# EAGLE board tcore (EAGLE 7.4.0)
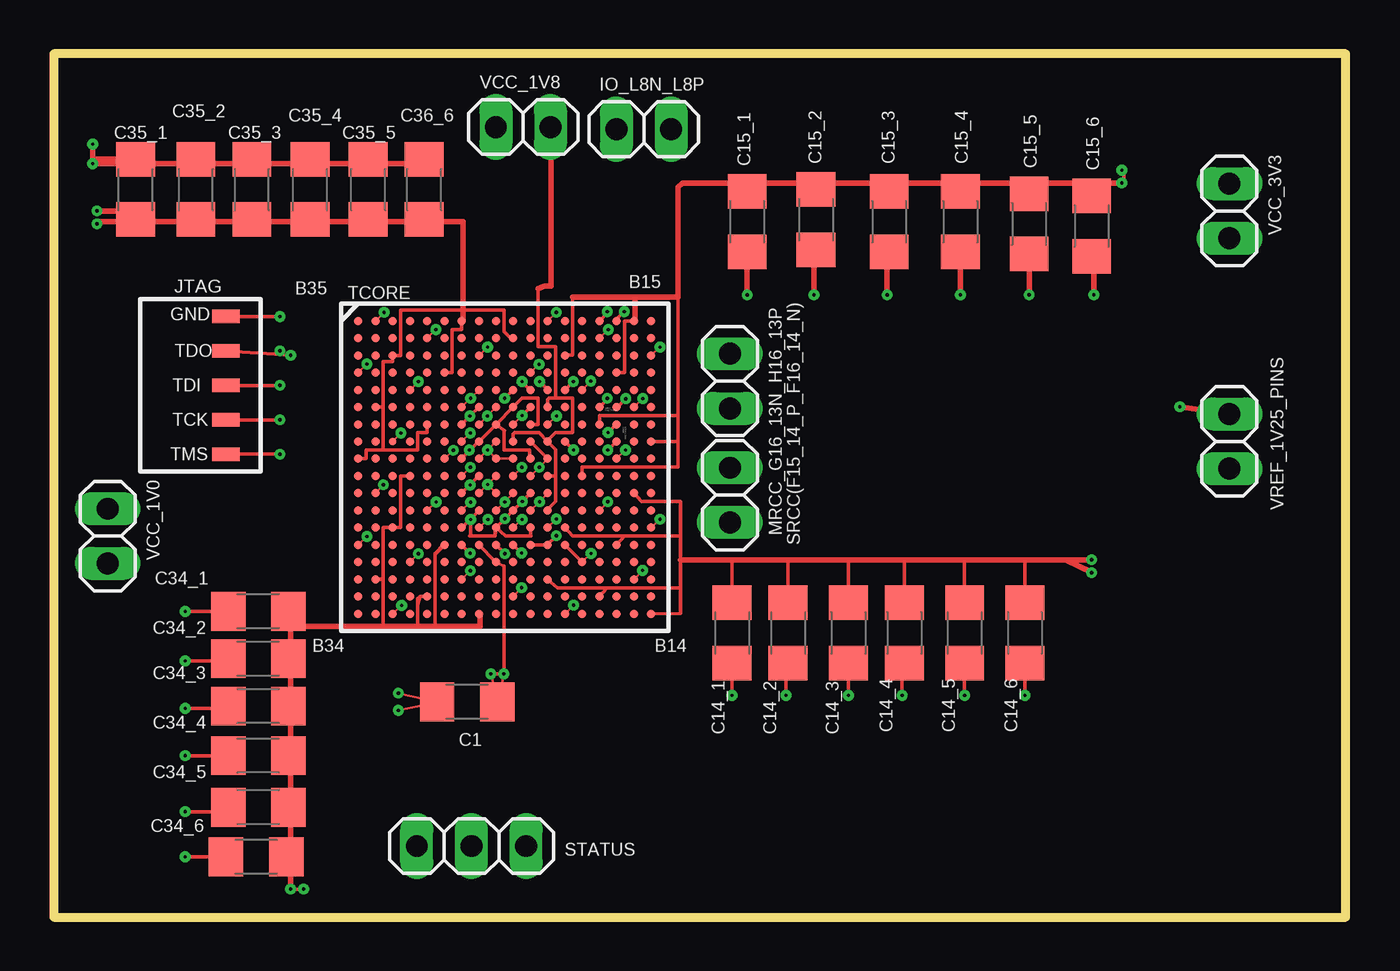
[diagram p0: board, top side]
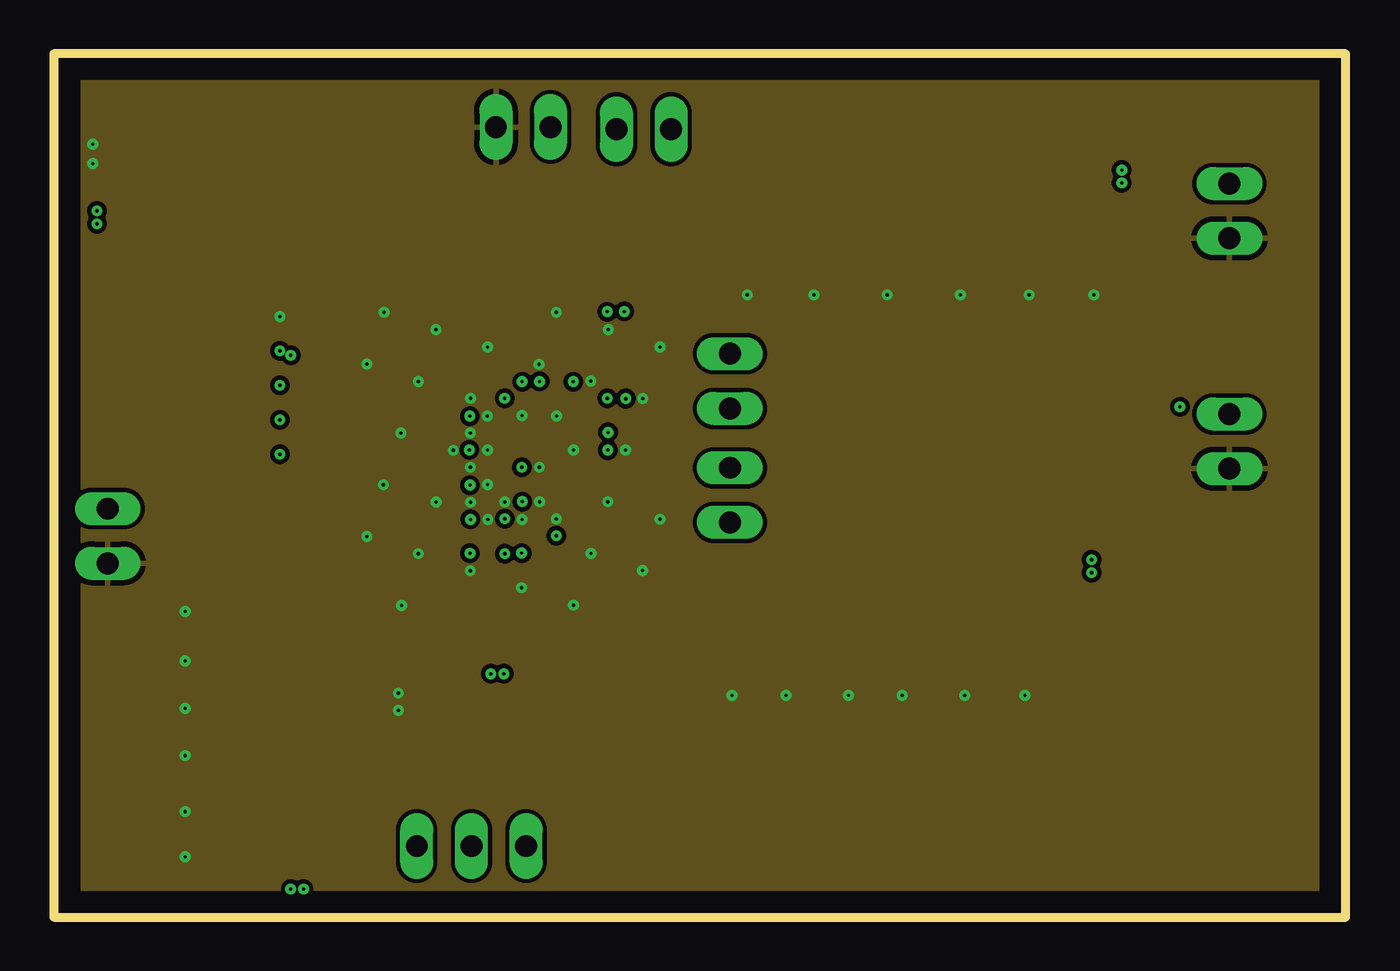
[diagram p1: board, inner layer Route2]
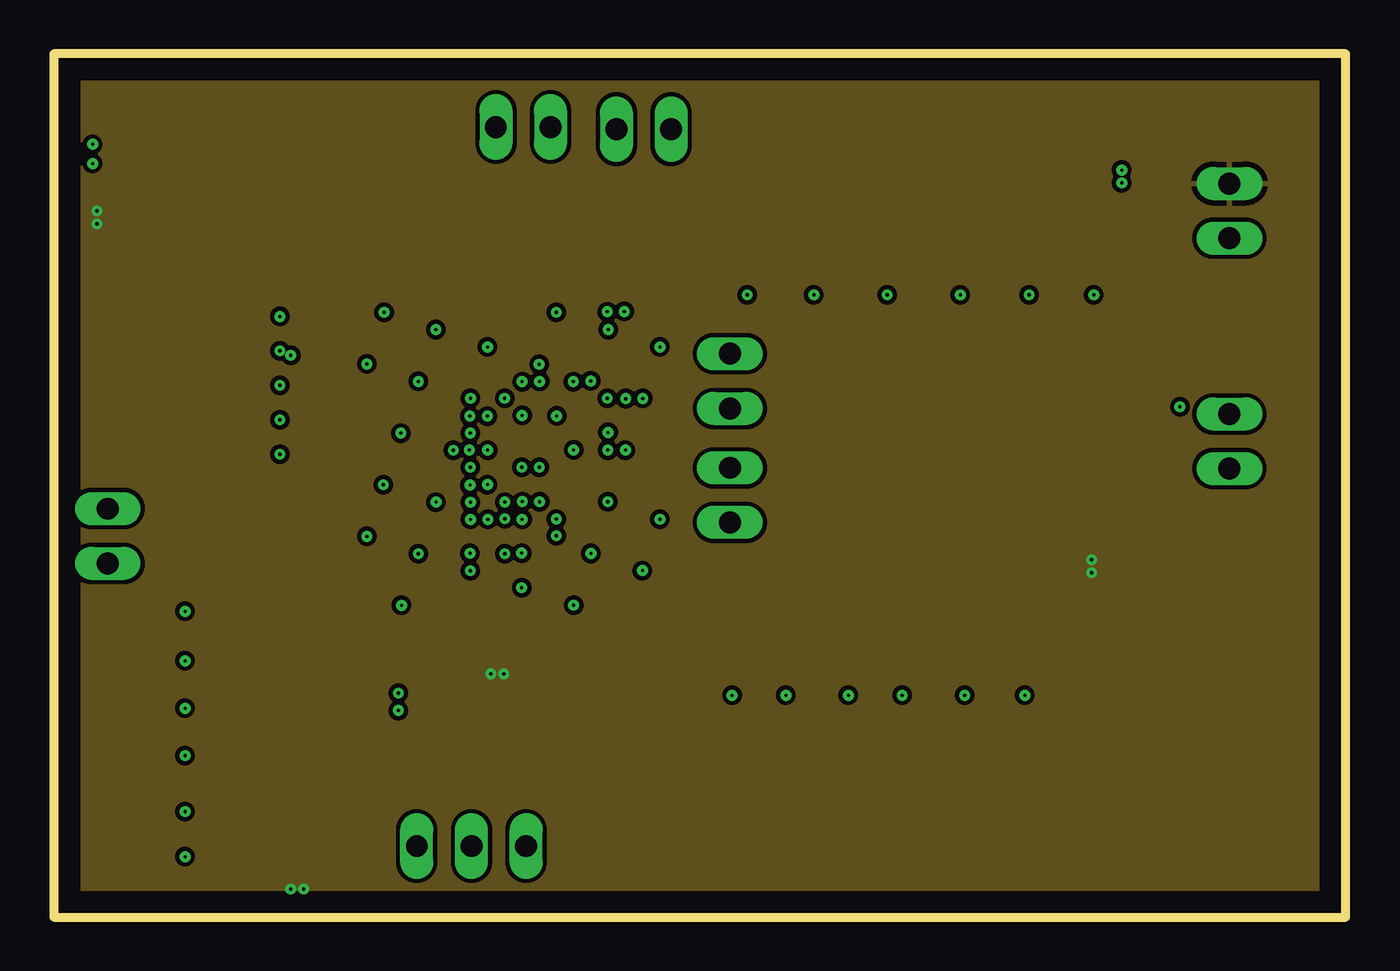
[diagram p2: board, inner layer Route15]
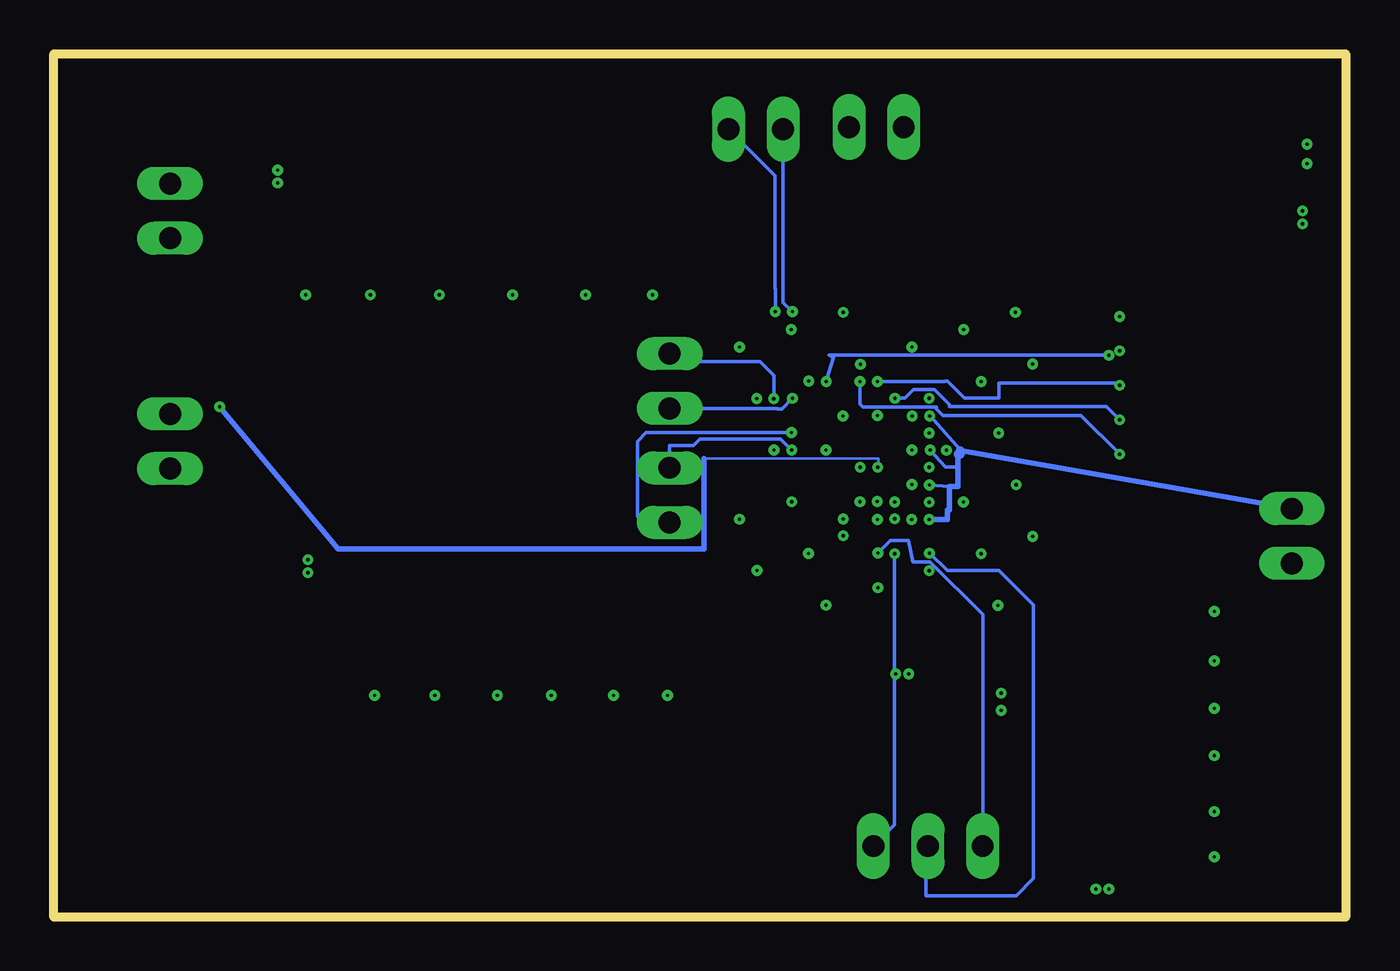
[diagram p3: board, bottom side, seen from below]

Size 60 x 40.1 mm. Coordinates in mm from the lower left corner, seen from the top.
Outline: 0,0 60,0 60,40.1 0,40.1 0,0
Copper layers (1+2*15+16): Top 0.035mm / dielectric 14mil / Route2 0.035mm / dielectric 28mil / Route15 0.035mm / dielectric 14mil / Bottom 0.035mm
Design rules "default *": minimum track width 10mil, minimum drill 0.15mm, track to track 8mil, track to pad 8mil, pad to pad 8mil, via to via 8mil, smd to smd 8mil, copper to edge 40mil, drill to drill 8mil, minimum pad ring 10mil, minimum via ring 0.175mm, stop-mask expansion 4mil, vias tented up to drill 0mil, thermal gap 10mil
Net classes: 0 default: width 1.25 mm; 1 GND: width 1.25 mm; 2 VCC_1V0: width 1.25 mm; 3 VREF_1V25: width 1.25 mm; 4 VCC_1V8: width 1.25 mm; 5 VCC_3V3: width 1.25 mm

## Footprints (pad centres in the part's own frame; a part is rotated, then mirrored left to right if it is on the bottom)
C1206 = smd 1.6 x 1.8: 1 -1.4,0; 2 1.4,0
1X02 = drill 1.016 long: 1 -1.27,0; 2 1.27,0
JTAG_HDR = smd 1.27 x 0.635: GND 4.8,8; TCK 4.8,3.2; TDI 4.8,4.8; TDO 4.8,6.4; TMS 4.8,1.6
1X03 = drill 1.016 long: 1 -2.54,0; 2 0,0; 3 2.54,0
TCORE_PAC = smd 0.4 x 0.4: A01@IO_L9N_T1_B35 0.8,14.4; A02@GND 1.6,14.4; A03@IO_L8N_T1_B35 2.4,14.4; A04@IO_L8P_T1_B35 3.2,14.4; A05@IO_L3N_T0_B35 4,14.4; A06@IO_L3P_T0_B35 4.8,14.4; A07@VCCO_B35 5.6,14.4; A08@IO_L12N_T1_B16 6.4,14.4; A09@IO_L14N_T2_B16 7.2,14.4; A10@IO_L14P_T2_B16 8,14.4; A11@IO_L4N_T0_B15 8.8,14.4; A12@GND 9.6,14.4; A13@IO_L9P_T1_B15 10.4,14.4; A14@IO_L9N_T1_B15 11.2,14.4; A15@IO_L8P_T1_B15 12,14.4; A16@IO_L8N_T1_B15 12.8,14.4; A17@VCCO_B15 13.6,14.4; A18@IO_L10N_T1_B15 14.4,14.4; B01@IO_L9P_T1_B35 0.8,13.6; B02@IO_L10N_T1_B35 1.6,13.6; B03@IO_L10P_T1_B35 2.4,13.6; B04@IO_L7N_T1_B35 3.2,13.6; B05@GND 4,13.6; B06@IO_L2N_T0_B35 4.8,13.6; B07@IO_L2P_T0_B35 5.6,13.6; B08@IO_L12P_T1_B16 6.4,13.6; B09@IO_L11N_T1_B16 7.2,13.6; B10@VCCO_B16 8,13.6; B11@IO_L4P_T0_B15 8.8,13.6; B12@IO_L3N_T0_B15 9.6,13.6; B13@IO_L2P_T0_B15 10.4,13.6; B14@IO_L2N_T0_B15 11.2,13.6; B15@GND 12,13.6; B16@IO_L7P_T1_B15 12.8,13.6; B17@IO_L7N_T1_B15 13.6,13.6; B18@IO_L10P_T1_B15 14.4,13.6; C01@IO_L16N_T2_B35 0.8,12.8; C02@IO_L16P_T2_B35 1.6,12.8; C03@VCCO_B35 2.4,12.8; C04@IO_L7P_T1_B35 3.2,12.8; C05@IO_L1N_T0_B35 4,12.8; C06@IO_L1P_T0_B35 4.8,12.8; C07@IO_L4N_T0_B35 5.6,12.8; C08@GND 6.4,12.8; C09@IO_L11P_T1_B16 7.2,12.8; C10@IO_L13N_T2_B16 8,12.8; C11@IO_L13P_T2_B16 8.8,12.8; C12@IO_L3P_T0_B15 9.6,12.8; C13@VCCO_B15 10.4,12.8; C14@IO_L1N_T0_B15 11.2,12.8; C15@IO_L12N_T1_B15 12,12.8; C16@IO_L20P_T3B15 12.8,12.8; C17@IO_L20N_T3_B15 13.6,12.8; C18@GND 14.4,12.8; D01@GND 0.8,12; D02@IO_L14N_T2_B35 1.6,12; D03@IO_L12N_T1_B35 2.4,12; D04@IO_L11N_T1_B35 3.2,12; D05@IO_L11P_T1_B35 4,12; D06@VCCO_B35 4.8,12; D07@IO_L6N_T0_VREF_B35 5.6,12; D08@IO_L4P_T0_B35 6.4,12; D09@IO_L6N_T0_VREF_B16 7.2,12; D10@IO_L19N_T3_VREF_B16 8,12; D11@GND 8.8,12; D12@IO_L6P_T0_B15 9.6,12; D13@IO_L6N_T0_VREF_B15 10.4,12; D14@IO_L1P_T0_B15 11.2,12; D15@IO_L12P_T1_B15 12,12; D16@VCCO_B15 12.8,12; D17@IO_L16N_T2_B15 13.6,12; D18@IO_L21N_T3_B15 14.4,12; E01@IO_L18N_T2_B35 0.8,11.2; E02@IO_L14P_T2_B35 1.6,11.2; E03@IO_L12P_T1_B35 2.4,11.2; E04@GND 3.2,11.2; E05@IO_L5N_T0_B35 4,11.2; E06@IO_L5P_T0_B35 4.8,11.2; E07@IO_L6P_T0_B35 5.6,11.2; E08@VCCBATT_B0 6.4,11.2; E09@CCLK_B0 7.2,11.2; E10@TCK_B0 8,11.2; E11@TDI_B0 8.8,11.2; E12@TMS_B0 9.6,11.2; E13@TDO_B0 10.4,11.2; E14@GND 11.2,11.2; E15@IO_L11P_T1_B15 12,11.2; E16@IO_L11N_T1_B15 12.8,11.2; E17@IO_L16P_T2_B15 13.6,11.2; E18@IO_L21P_T3_B15 14.4,11.2; F01@IO_L18P_T2_B35 0.8,10.4; F02@VCCO_B35 1.6,10.4; F03@IO_L13N_T2_B35 2.4,10.4; F04@IO_L13P_T2_B35 3.2,10.4; F05@IO_0_B35 4,10.4; F06@IO_L19N_T3_VREF_B35 4.8,10.4; F07@GND 5.6,10.4; F08@VCCINT 6.4,10.4; F09@GND 7.2,10.4; F10@VCCBRAM 8,10.4; F11@GND 8.8,10.4; F12@VCCAUX 9.6,10.4; F13@IO_L5P_T0_B15 10.4,10.4; F14@IO_L5N_T0_B15 11.2,10.4; F15@IO_L14P_T2_B15 12,10.4; F16@IO_L14N_T2_B15 12.8,10.4; F17@GND 13.6,10.4; F18@IO_L22N_T3_B15 14.4,10.4; G01@IO_L17N_T2_B35 0.8,9.6; G02@IO_L15N_T2_B5 1.6,9.6; G03@IO_L20N_T3_B35 2.4,9.6; G04@IO_L20P_T3_B35 3.2,9.6; G05@VCCO_B35 4,9.6; G06@IO_L19P_T3_B35 4.8,9.6; G07@VCCINT 5.6,9.6; G08@GND 6.4,9.6; G09@VCCINT 7.2,9.6; G10@GND 8,9.6; G11@VCCBRAM 8.8,9.6; G12@GND 9.6,9.6; G13@IO_0_B15 10.4,9.6; G14@IO_L15N_T2_B15 11.2,9.6; G15@VCCO_15 12,9.6; G16@IO_L13N_T2_B15 12.8,9.6; G17@IO_L18N_T2_B15 13.6,9.6; G18@IO_L22P_T3_B15 14.4,9.6; H01@IO_L17P_T2_B35 0.8,8.8; H02@IO_L15P_T2_B35 1.6,8.8; H04@IO_L21N_T3_B35 3.2,8.8; H05@IO_L24N_T3_B35 4,8.8; H06@IO_L24P_T3_B35 4.8,8.8; H07@GND 5.6,8.8; H08@VCCINT 6.4,8.8; H09@GNDADC_B0 7.2,8.8; H10@VCCADC_B0 8,8.8; H11@GND 8.8,8.8; H12@VCCAUX 9.6,8.8; H13@GND 10.4,8.8; H14@IO_L15P_T2_B15 11.2,8.8; H15@IO_L19N_T3_VREF_B15 12,8.8; H16@IO_L13P_T2_B15 12.8,8.8; H17@IO_L18P_T2_B15 13.6,8.8; H18@VCCO_B15 14.4,8.8; J01@VCCO_B35 0.8,8; J02@IO_L22N_T3_B35 1.6,8; J03@IO_L22P_T3_B35 2.4,8; J04@IO_L21P_T3_B35 3.2,8; J05@IO_25_B35 4,8; J06@GND 4.8,8; J07@VCCINT 5.6,8; J08@GND 6.4,8; J09@VREFN_0 7.2,8; J10@VP_0 8,8; J11@VCCINT 8.8,8; J12@GND 9.6,8; J13@IO_L17N_T2_B15 10.4,8; J14@IO_L19P_T3_B15 11.2,8; J15@IO_L24N_T3_B15 12,8; J16@GND 12.8,8; J17@IO_L23P_T3_B15 13.6,8; J18@IO_L23N_T3_B15 14.4,8; K01@IO_L23N_T3_B35 0.8,7.2; K02@IO_L23P_T3_B35 1.6,7.2; K03@IO_L2P_T0_B34 2.4,7.2; K04@VCCO_B34 3.2,7.2; K05@IO_L5P_T0_B34 4,7.2; K06@IO_0_B34 4.8,7.2; K07@GND 5.6,7.2; K08@VCCINT 6.4,7.2; K09@VN_B0 7.2,7.2; K10@VREFP_B0 8,7.2; K11@GND 8.8,7.2; K12@VCCAUX 9.6,7.2; K13@IO_L17P_T2_B15 10.4,7.2; K14@VCCO_B15 11.2,7.2; K15@IO_L24P_T3_B15 12,7.2; K16@IO_25_B15 12.8,7.2; K17@IO_L1P_T0_B14 13.6,7.2; K18@IO_L1N_T0_B14 14.4,7.2; L01@IO_L1P_T0_34 0.8,6.4; L02@GND 1.6,6.4; L03@IO_L2N_T0_B34 2.4,6.4; L04@IO_L5N_T0_B34 3.2,6.4; L05@IO_L6N_T0_VREF_B34 4,6.4; L06@IO_L6P_T0_B34 4.8,6.4; L07@VCCINT 5.6,6.4; L08@GND 6.4,6.4; L09@DXN_B0 7.2,6.4; L10@DXP_B0 8,6.4; L11@VCCINT 8.8,6.4; L12@GND 9.6,6.4; L13@IO_L6P_T0_B14 10.4,6.4; L14@IO_L2P_T0_B14 11.2,6.4; L15@IO_L3P_T0_B14 12,6.4; L16@IO_L3N_T0_B14 12.8,6.4; L17@VCCO_B14 13.6,6.4; L18@IO_L4P_T0_B14 14.4,6.4; M01@IO_L1N_T0_B34 0.8,5.6; M02@IO_L4N_T0_B34 1.6,5.6; M03@IO_L4P_T0_B34 2.4,5.6; M04@IO_L16P_T2_B34 3.2,5.6; M05@GND 4,5.6; M06@IO_L18P_T2_B34 4.8,5.6; M07@GND 5.6,5.6; M08@VCCINT 6.4,5.6; M09@GND 7.2,5.6; M10@VCCINT 8,5.6; M11@GND 8.8,5.6; M12@VCCAUX 9.6,5.6; M13@IO_L6N_T0_VREF_B14 10.4,5.6; M14@IO_L2N_T0_B14 11.2,5.6; M15@GND 12,5.6; M16@IO_L10P_T1_B14 12.8,5.6; M17@IO_L10N_T1_B14 13.6,5.6; M18@IO_L4N_T0_B14 14.4,5.6; N01@IO_L3N_T0_B34 0.8,4.8; N02@IO_L3P_T0_B34 1.6,4.8; N03@VCCO_B34 2.4,4.8; N04@IO_L16N_T2_B34 3.2,4.8; N05@IO_L13P_T2_B34 4,4.8; N06@IO_L18N_T2_B34 4.8,4.8; N07@VCCINT 5.6,4.8; N08@GND 6.4,4.8; N09@VCCINT 7.2,4.8; N10@GND 8,4.8; N11@VCCINT 8.8,4.8; N12@GND 9.6,4.8; N13@VCCO_14 10.4,4.8; N14@IO_L8P_T1_B14 11.2,4.8; N15@IO_L11P_T1_B14 12,4.8; N16@IO_L11N_T1_B14 12.8,4.8; N17@IO_L9P_T1_B14 13.6,4.8; N18@GND 14.4,4.8; P01@GND 0.8,4; P02@IO_L15P_T2_B34 1.6,4; P03@IO_L14N_T2_B34 2.4,4; P04@IO_L14P_T2_B34 3.2,4; P05@IO_L13N_T2_B34 4,4; P06@VCCO_B34 4.8,4; P07@INIT_B_B0 5.6,4; P08@CFGBVS_0B 6.4,4; P09@PROGRAM_B_B0 7.2,4; P10@DONE_B0 8,4; P11@M2_B0 8.8,4; P12@M0_B0 9.6,4; P13@M1_B0 10.4,4; P14@IO_L8N_T1_B14 11.2,4; P15@IO_L13P_T2_B14 12,4; P16@VCCO_14 12.8,4; P17@IO_L12P_T1_B14 13.6,4; P18@IO_L9N_T1_B14 14.4,4; R01@IO_L17P_T2_B34 0.8,3.2; R02@IO_L15N_T2_B34 1.6,3.2; R03@IO_L11P_T1_B34 2.4,3.2; R04@GND 3.2,3.2; R05@IO_L19N_T3_VREF_B34 4,3.2; R06@IO_L19P_T3_B34 4.8,3.2; R07@IO_L23P_T3_B34 5.6,3.2; R08@IO_L24P_T3_B34 6.4,3.2; R09@VCCO_B0 7.2,3.2; R10@IO_25_B14 8,3.2; R11@IO_0_B14 8.8,3.2; R12@IO_L5P_T0_B14 9.6,3.2; R13@IO_L5N_T0_B14 10.4,3.2; R14@GND 11.2,3.2; R15@IO_L13N_T2_B14 12,3.2; R16@IO_L15P_T2_B_14 12.8,3.2; R17@IO_L12N_T1_B14 13.6,3.2; R18@IO_L7P_T1_B14 14.4,3.2; T01@IO_L17N_T2_B34 0.8,2.4; T02@VCCO_B34 1.6,2.4; T03@IO_L11N_T1_B34 2.4,2.4; T04@IO_L12N_T1_B34 3.2,2.4; T05@IO_L12P_T1_B34 4,2.4; T06@IO_L23N_T3_B34 4.8,2.4; T07@GND 5.6,2.4; T08@IO_L24N_T3_B34 6.4,2.4; T09@IO_L24P_T3_B14 7.2,2.4; T10@IO_L24N_T3_B14 8,2.4; T11@IO_L19P_T3_B14 8.8,2.4; T12@VCCO_B14 9.6,2.4; T13@IO_L23P_T3_B14 10.4,2.4; T14@IO_L14P_T2_B14 11.2,2.4; T15@IO_L14N_T2_B14 12,2.4; T16@IO_L15N_T2_B14 12.8,2.4; T17@GND 13.6,2.4; T18@IO_L7N_T1_B14 14.4,2.4; U01@IO_L7P_T1_B34 0.8,1.6; U02@IO_L9P_T1_B34 1.6,1.6; U03@IO_L8N_T1_B34 2.4,1.6; U04@IO_L8P_T1_B34 3.2,1.6; U05@VCCO_B34 4,1.6; U06@IO_L22N_T3_B34 4.8,1.6; U07@IO_L22P_T3_B34 5.6,1.6; U08@IO_25_B34 6.4,1.6; U09@IO_L21P_T3_B34 7.2,1.6; U10@GND 8,1.6; U11@IO_L19N_T3_VREF_B14 8.8,1.6; U12@IO_L20P_T3_B14 9.6,1.6; U13@IO_L23N_T3_B14 10.4,1.6; U14@IO_L22P_T3_B14 11.2,1.6; U15@VCCO_B14 12,1.6; U16@IO_L18P_T2_B14 12.8,1.6; U17@IO_L17P_T2_B14 13.6,1.6; U18@IO_L17N_T2_B14 14.4,1.6; V01@IO_L7N_T1_B34 0.8,0.8; V02@IO_L9N_T1_B34 1.6,0.8; V03@GND 2.4,0.8; V04@IO_L10N_T1_B34 3.2,0.8; V05@IO_L10P_T1_B34 4,0.8; V06@IO_L20N_T3_B34 4.8,0.8; V07@IO_L20P_T3_B34 5.6,0.8; V08@VCCO_B34 6.4,0.8; V09@IO_L21N_T3_B34 7.2,0.8; V10@IO_L21P_T3_B14 8,0.8; V11@IO_L21N_T3_B14 8.8,0.8; V12@IO_L20N_T3_B14 9.6,0.8; V13@GND 10.4,0.8; V14@IO_L22N_T3_B14 11.2,0.8; V15@IO_L16P_T2_B14 12,0.8; V16@IO_L16N_T2_B14 12.8,0.8; V17@IO_L18N_T2_B14 13.6,0.8; V18@VCCO_B14 14.4,0.8 | smd 0.36 x 0.36: H03@GND 2.4,8.8

## Placement (x,y rotation side)
C1  47uF  [C1206]  19.2,10 180 top
C14_1  0.47uF  [C1206]  31.5,13.2 270 top
C14_2  0.47uF  [C1206]  34.1,13.2 270 top
C14_3  4.7uF  [C1206]  36.9,13.2 270 top
C14_4  4.7uF  [C1206]  39.5,13.2 270 top
C14_5  4.7uF  [C1206]  42.3,13.2 270 top
C14_6  4.7uF  [C1206]  45.1,13.2 270 top
C15_1  0.47uF  [C1206]  32.2,32.3 270 top
C15_2  0.47uF  [C1206]  35.4,32.4 270 top
C15_3  4.7uF  [C1206]  38.8,32.3 270 top
C15_4  4.7uF  [C1206]  42.1,32.3 270 top
C15_5  4.7uF  [C1206]  45.3,32.2 270 top
C15_6  4.7uF  [C1206]  48.2,32.1 270 top
C34_1  0.47uF  [C1206]  9.5,14.2 180 top
C34_2  0.47uF  [C1206]  9.5,12 180 top
C34_3  4.7uF  [C1206]  9.5,9.8 180 top
C34_4  4.7uF  [C1206]  9.5,7.5 180 top
C34_5  4.7uF  [C1206]  9.5,5.1 180 top
C34_6  4.7uF  [C1206]  9.4,2.8 180 top
C35_1  0.47uF  [C1206]  3.8,33.8 90 top
C35_2  0.47uF  [C1206]  6.6,33.8 90 top
C35_3  4.7uF  [C1206]  9.2,33.8 90 top
C35_4  4.7uF  [C1206]  11.9,33.8 90 top
C35_5  4.7uF  [C1206]  14.6,33.8 90 top
C36_6  4.7uF  [C1206]  17.2,33.8 90 top
IO_L8N_L8P  [1X02]  27.4,36.6 180 top
JTAG_HEADER1  JTAG_HEADER  [JTAG_HDR]  3.2,19.9 0 top
MRCC_G16_13N_H16_13P  [1X02]  31.4,24.9 270 top
SRCC(F15_14_P_F16_14_N)  [1X02]  31.4,19.6 90 top
STATUS  3:P 2:I 1:D  [1X03]  19.4,3.3 0 top
TCORE  TCORECFG324  [TCORE_PAC]  13.34,13.29 0 top
VCC_1V0  [1X02]  2.5,17.7 270 top
VCC_1V8  [1X02]  21.8,36.7 180 top
VCC_3V3  [1X02]  54.6,32.8 270 top
VREF_1V25_PINS  [1X02]  54.6,22.1 270 top

## Library data of the parts
C1 C14_1-C14_6 C15_1-C15_6 C34_1-C34_6 C35_1-C35_5 C36_6 = rcl
IO_L8N_L8P MRCC_G16_13N_H16_13P SRCC(F15_14_P_F16_14_N) STATUS VCC_1V0 VCC_1V8 VCC_3V3 VREF_1V25_PINS = pinhead
JTAG_HEADER1 TCORE = tcore

## Nets
GND: C1.2 C14_1.2 C15_1.2 C34_1.2 C35_1.2 JTAG_HEADER1.GND TCORE.A02@GND TCORE.A12@GND TCORE.B05@GND TCORE.B15@GND TCORE.C08@GND TCORE.C18@GND TCORE.D01@GND TCORE.D11@GND TCORE.E04@GND TCORE.E08@VCCBATT_B0 TCORE.E14@GND TCORE.F07@GND TCORE.F09@GND TCORE.F11@GND TCORE.F17@GND TCORE.G08@GND TCORE.G10@GND TCORE.G12@GND TCORE.H03@GND TCORE.H07@GND TCORE.H09@GNDADC_B0 TCORE.H11@GND TCORE.H13@GND TCORE.J06@GND TCORE.J08@GND TCORE.J09@VREFN_0 TCORE.J10@VP_0 TCORE.J12@GND TCORE.J16@GND TCORE.K07@GND TCORE.K09@VN_B0 TCORE.K11@GND TCORE.L02@GND TCORE.L08@GND TCORE.L09@DXN_B0 TCORE.L10@DXP_B0 TCORE.L12@GND TCORE.M05@GND TCORE.M07@GND TCORE.M09@GND TCORE.M11@GND TCORE.M15@GND TCORE.N08@GND TCORE.N10@GND TCORE.N12@GND TCORE.N18@GND TCORE.P01@GND TCORE.P13@M1_B0 TCORE.R04@GND TCORE.R14@GND TCORE.T07@GND TCORE.T17@GND TCORE.U10@GND TCORE.V03@GND TCORE.V13@GND VCC_1V0.2 VCC_1V8.2 VCC_3V3.2 VREF_1V25_PINS.2
N$3: JTAG_HEADER1.TDO TCORE.E13@TDO_B0
N$4: JTAG_HEADER1.TCK TCORE.E10@TCK_B0
N$5: JTAG_HEADER1.TDI TCORE.E11@TDI_B0
N$6: JTAG_HEADER1.TMS TCORE.E12@TMS_B0
N$11: STATUS.3 TCORE.P09@PROGRAM_B_B0
N$15: STATUS.2 TCORE.P07@INIT_B_B0
N$16: STATUS.1 TCORE.P10@DONE_B0
N$20: IO_L8N_L8P.2 TCORE.A15@IO_L8P_T1_B15
N$23: MRCC_G16_13N_H16_13P.1 TCORE.F16@IO_L14N_T2_B15
N$24: MRCC_G16_13N_H16_13P.2 TCORE.F15@IO_L14P_T2_B15
N$25: SRCC(F15_14_P_F16_14_N).1 TCORE.G16@IO_L13N_T2_B15
N$26: SRCC(F15_14_P_F16_14_N).2 TCORE.H16@IO_L13P_T2_B15
N$28: IO_L8N_L8P.1 TCORE.A16@IO_L8N_T1_B15
VCC_1V0 [VCC_1V0]: TCORE.F08@VCCINT TCORE.F10@VCCBRAM TCORE.G07@VCCINT TCORE.G09@VCCINT TCORE.G11@VCCBRAM TCORE.H08@VCCINT TCORE.J07@VCCINT TCORE.J11@VCCINT TCORE.K08@VCCINT TCORE.L07@VCCINT TCORE.L11@VCCINT TCORE.M08@VCCINT TCORE.M10@VCCINT TCORE.N07@VCCINT TCORE.N09@VCCINT TCORE.N11@VCCINT VCC_1V0.1
VCC_1V8: TCORE.F12@VCCAUX TCORE.H10@VCCADC_B0 TCORE.H12@VCCAUX TCORE.K12@VCCAUX TCORE.M12@VCCAUX VCC_1V8.1
VCC_3V3: TCORE.P11@M2_B0 TCORE.P12@M0_B0
VCCO_B14 [VCC_3V3]: C1.1 TCORE.A07@VCCO_B35 TCORE.B10@VCCO_B16 TCORE.C03@VCCO_B35 TCORE.D06@VCCO_B35 TCORE.F02@VCCO_B35 TCORE.G05@VCCO_B35 TCORE.J01@VCCO_B35 TCORE.K04@VCCO_B34 TCORE.L17@VCCO_B14 TCORE.N03@VCCO_B34 TCORE.N13@VCCO_14 TCORE.P06@VCCO_B34 TCORE.P08@CFGBVS_0B TCORE.P16@VCCO_14 TCORE.R09@VCCO_B0 TCORE.T02@VCCO_B34 TCORE.T12@VCCO_B14 TCORE.U05@VCCO_B34 TCORE.U15@VCCO_B14 TCORE.V08@VCCO_B34 TCORE.V18@VCCO_B14 VCC_3V3.1
VCCO_B15: TCORE.A17@VCCO_B15 TCORE.C13@VCCO_B15 TCORE.D16@VCCO_B15 TCORE.G15@VCCO_15 TCORE.H18@VCCO_B15 TCORE.K14@VCCO_B15
VREF_1V25 [VREF_1V25]: TCORE.K10@VREFP_B0 VREF_1V25_PINS.1

## Tracks (layer width: path | path; a pad name or v marks a point on that pad's centre or on a via)
GND  (via drill 0.15)
  Top 0.125: TCORE.F07@GND v19.35,24.1 TCORE.E08@VCCBATT_B0 | TCORE.G08@GND v20.13,23.27 TCORE.F09@GND | TCORE.G10@GND v21.75,23.3 | TCORE.J06@GND v18.55,21.68 | TCORE.H07@GND v19.34,22.48 | TCORE.J08@GND v20.15,21.69 | TCORE.K07@GND v19.34,20.89 | TCORE.M05@GND v17.75,19.28 | TCORE.L02@GND v15.31,20.08 | TCORE.H03@GND v16.12,22.48 | TCORE.T07@GND v19.34,16.09 | TCORE.R04@GND v16.93,16.88 | TCORE.V03@GND v16.15,14.48 | TCORE.P01@GND v14.54,17.68 | TCORE.N08@GND v20.16,18.47 | TCORE.M07@GND v19.35,19.27 | TCORE.N10@GND v21.75,18.47 | TCORE.M09@GND v20.95,19.28 TCORE.L10@DXP_B0 | TCORE.K11@GND v22.55,20.89 TCORE.J12@GND | TCORE.N18@GND v28.15,18.48 | TCORE.T17@GND v27.34,16.1 | TCORE.M15@GND v25.73,19.29 | TCORE.J16@GND v26.55,21.69 | TCORE.F17@GND v27.35,24.09 | TCORE.E14@GND v24.94,24.9 | TCORE.C18@GND v28.15,26.48 | TCORE.B15@GND v25.75,27.29 | TCORE.A12@GND v23.34,28.09 | TCORE.D11@GND v22.54,25.68 | TCORE.C08@GND v20.14,26.48 | TCORE.D01@GND v14.54,25.69 | TCORE.A02@GND v15.34,28.09 | TCORE.B05@GND v17.74,27.29 | TCORE.M11@GND v22.56,19.29 TCORE.L12@GND | TCORE.N12@GND v23.34,18.49 | TCORE.R14@GND v24.95,16.89 | TCORE.U10@GND v21.73,15.3 | TCORE.V13@GND v24.14,14.49 | TCORE.L08@GND v20.14,20.09 | TCORE.E04@GND v16.93,24.88 | TCORE.G12@GND v23.35,23.28 | TCORE.H09@GNDADC_B0 v20.15,21.69 | TCORE.J10@VP_0 TCORE.J09@VREFN_0 v20.15,21.69 | v20.15,21.69 20.2,21.7 | TCORE.L09@DXN_B0 v20.14,20.09 | TCORE.K09@VN_B0 v20.14,20.09 | v16,10.4 C1.2 | v16,9.6 17.9,10
  Top 0.152: v31.5,10.3 C14_1.2 | v34,10.3 34,11.4 | v36.9,10.3 36.9,11.5 | v39.4,10.3 39.4,11.3 | v42.3,10.3 42.3,11.3 | v6.1,14.2 C34_1.2 8.2,14.2 | v6.1,11.9 8.1,11.9 | v6.1,9.7 8.1,9.7 | v6.1,7.5 7.9,7.5 | v6.1,4.9 8.1,4.9 | v6.1,2.8 7.8,2.8 | TCORE.F11@GND v21.75,23.3 | TCORE.H11@GND TCORE.J12@GND | TCORE.H13@GND v24.14,21.7 | TCORE.P13@M1_B0 TCORE.R14@GND | v10.5,27.9 JTAG_HEADER1.GND
  Top 0.254: C15_1.2 v32.2,28.9 | v35.3,28.9 35.3,30.5 | v38.7,28.9 38.7,30.3 | v42.1,28.9 42.1,30.3 | v45.3,28.9 45.3,30.3 | v48.3,28.9 48.3,30.1 | v1.8,35 17.9,35 | v1.8,35.9 v1.8,35 | v1.8,35 2,35.2 C35_1.2
  other vias: 45.1,10.3
  pour Route2: 1,99 159,99 159,1 1,1
N$1
  Top 0.152: 45.1,10.4 45.1,11.3
N$2
  Top 0.152: 31.5,15.1 31.5,16.5
N$3  (via drill 0.15)
  Top 0.152: JTAG_HEADER1.TDO v11,26.1 | TCORE.E13@TDO_B0 v24.12,24.87 v24.13,24.87
  Bottom 0.152: v11,26.1 24,26.1 23.8,26 v24.13,24.87
N$4  (via drill 0.15)
  Top 0.152: JTAG_HEADER1.TCK v10.5,23.1 | v20.94,24.1 TCORE.E10@TCK_B0
  Bottom 0.152: v10.5,23.1 11.12,23.72 18.4,23.72 18.4,23.8 19.1,24.5 20.08,24.5 20.48,24.1 v20.94,24.1
N$5  (via drill 0.15)
  Top 0.152: JTAG_HEADER1.TDI v10.5,24.7 | v21.75,24.87 TCORE.E11@TDI_B0
  Bottom 0.152: v10.5,24.7 10.6,24.8 16.1,24.8 16.1,24.1 17.7,24.1 18.5,24.9 18.6,24.9 18.63,24.87 v21.75,24.87
N$6  (via drill 0.15)
  Top 0.152: JTAG_HEADER1.TMS v10.5,21.5 | v22.56,24.88 TCORE.E12@TMS_B0
  Bottom 0.152: v10.5,21.5 12.3,23.3 18.7,23.3 19,23.6 19,23.7 22.42,23.7 22.56,23.84 v22.56,24.88
N$7  (via drill 0.15)
  other vias: 10.5,26.3
N$8  (via drill 0.15)
  other vias: 10.5,24.7
N$9  (via drill 0.15)
  other vias: 10.5,23.1
N$10  (via drill 0.15)
  other vias: 10.5,21.5
N$11  (via drill 0.15)
  Top 0.152: v20.95,16.88 TCORE.P09@PROGRAM_B_B0
  Bottom 0.152: STATUS.3 20.95,4.29 v20.95,16.88
N$12  (via drill 0.15)
  other vias: 22.56,24.88
N$13  (via drill 0.15)
  other vias: 21.75,24.87
N$14  (via drill 0.15)
  other vias: 20.94,24.1
N$15  (via drill 0.15)
  Top 0.152: v19.33,16.9 TCORE.P07@INIT_B_B0
  Bottom 0.152: STATUS.2 19.5,3.2 19.5,1 15.3,1 14.5,1.8 14.5,14.5 16.1,16.1 18.5,16.1 19.3,16.9 v19.33,16.9
N$16  (via drill 0.15)
  Top 0.152: TCORE.P10@DONE_B0 v21.72,16.91 v21.73,16.91
  Bottom 0.152: v21.73,16.91 21.14,17.5 20.3,17.5 20.1,16.5 19.3,16.5 16.86,14.06 STATUS.1
N$17  (via drill 0.15)
  other vias: 21.73,16.91
N$18  (via drill 0.15)
  other vias: 20.95,16.88
N$19  (via drill 0.15)
  other vias: 19.33,16.9
N$20  (via drill 0.15)
  Top 0.152: TCORE.A15@IO_L8P_T1_B15 25.7,28.05 v25.7,28.12
  Bottom 0.152: v25.7,28.12 26.13,28.55 IO_L8N_L8P.2
N$21  (via drill 0.15)
  other vias: 26.56,24.09
N$22  (via drill 0.15)
  other vias: 25.73,21.7
N$23  (via drill 0.15)
  Top 0.152: v26.56,24.08 26.17,23.69 TCORE.F16@IO_L14N_T2_B15
  Bottom 0.152: MRCC_G16_13N_H16_13P.1 31.03,25.8 27.2,25.8 26.56,25.16 v26.56,24.08
N$24  (via drill 0.15)
  Top 0.152: TCORE.F15@IO_L14P_T2_B15 25.7,24.05 v25.7,24.1
  Bottom 0.152: v25.7,24.1 26.19,23.61 26.4,23.61 26.42,23.63 MRCC_G16_13N_H16_13P.2
N$25  (via drill 0.15)
  Top 0.152: TCORE.G16@IO_L13N_T2_B15 26.12,22.89 v25.74,22.51
  Bottom 0.152: v25.74,22.51 32.49,22.51 32.9,22.1 32.9,18.6 32.6,18.3 31.43,18.3 SRCC(F15_14_P_F16_14_N).1
N$26  (via drill 0.15)
  Top 0.152: TCORE.H16@IO_L13P_T2_B15 v25.74,21.69 v25.73,21.69
  Bottom 0.152: SRCC(F15_14_P_F16_14_N).2 31.4,21.9 30.3,21.9 30,22.2 26.24,22.2 v25.73,21.69
N$27  (via drill 0.15)
  other vias: 25.7,24.1
N$28  (via drill 0.15)
  Top 0.152: v26.49,28.13 26.14,27.78 TCORE.A16@IO_L8N_T1_B15
  Bottom 0.152: IO_L8N_L8P.1 26.5,34.43 26.5,29.2 26.49,29.19 v26.49,28.13
N$29  (via drill 0.15)
  other vias: 26.49,28.13
N$30  (via drill 0.15)
  other vias: 25.7,28.12
N$31  (via drill 0.15)
  other vias: 25.74,22.51
VCC_1V0  (via drill 0.15)
  Top 0.152: TCORE.N07@VCCINT v19.35,18.47 | TCORE.M08@VCCINT v19.35,18.47 | TCORE.N09@VCCINT arc90 20.5,18.05 20.5,17.7 | 20.5,17.7 19.3,17.7 arc90 19.35,17.75 v19.35,18.47 | TCORE.L11@VCCINT v21.76,19.3 TCORE.M10@VCCINT v20.95,18.5 TCORE.N09@VCCINT | TCORE.N09@VCCINT 20.5,17.7 | TCORE.N11@VCCINT 22.14,17.71 | 22.14,17.71 22.17,17.71 | 22.14,17.71 20.98,17.71 TCORE.N09@VCCINT | TCORE.G07@VCCINT v19.32,23.27 TCORE.F08@VCCINT | TCORE.J07@VCCINT v19.3,21.7 TCORE.H08@VCCINT TCORE.G09@VCCINT | TCORE.G09@VCCINT TCORE.F10@VCCBRAM 21.75,24.1 22.5,24.1 22.5,22.9 22.49,22.89 TCORE.G11@VCCBRAM | TCORE.L07@VCCINT v19.33,20.07 19.3,20.1 | 19.4,20.1 19.3,20.1 | 19.3,20.1 TCORE.K08@VCCINT | TCORE.G09@VCCINT 20.95,22.61 20.9,22.56 20.9,21.7 22.1,21.7 22.1,21.29 TCORE.J11@VCCINT
  Bottom 0.152: 18,20.9 18.6,20.9 v19.3,21.7 | 18.4,20 v19.33,20.07 | 18,21.3 18,21.6 17.9,21.7 19.3,23.3 v19.32,23.28 v19.32,23.27
  Bottom 0.254: VCC_1V0.1 17.9,21.67 | 18,21.5 18,21.3 18,20.9 18,20 18.4,20 18.4,18.9 18.5,18.9 18.5,18.47 v19.35,18.47
  Bottom 0.406: 17.9,21.67 17.9,21.5 18,21.5
VCC_1V8
  Top 0.152: TCORE.H10@VCCADC_B0 21.34,22.44 21.4,22.5 22.53,22.5 TCORE.H12@VCCAUX | TCORE.H12@VCCAUX 22.94,22.14 23.3,22.5 24.1,22.5 24.1,24.1 23.3,24.1 | TCORE.F12@VCCAUX 22.94,24.04 23,24.1 23.3,24.1 | 23.3,24.1 23.3,26.5 22.5,26.5 22.5,29.2 | 23.1,36.67 VCC_1V8.1 | TCORE.M12@VCCAUX 22.94,18.94 23.3,19.3 23.3,20.5 | 23.3,20.5 23.3,21.73 TCORE.H12@VCCAUX | TCORE.K12@VCCAUX 23.29,20.49 23.3,20.5
  Top 0.254: 22.5,29.2 22.8,29.3 23.1,29.3 23.1,36.67
VCC_3V3  (via drill 0.15)
  Top 0.152: v23.34,17.71 22.94,17.31 TCORE.P12@M0_B0 TCORE.P11@M2_B0
VCCO_B14  (via drill 0.15)
  Top 0.125: v20.3,11.3 C1.1 v20.9,11.3 | TCORE.R09@VCCO_B0 20.88,16.3 20.5,16.5
  Top 0.152: TCORE.V08@VCCO_B34 19.74,13.5 | 19.74,13.5 19.8,13.5 | 19.74,13.5 18.1,13.5 17.7,13.5 | 16.9,13.5 16.8,13.5 15.3,13.5 15.3,15.69 | TCORE.K04@VCCO_B34 16.1,20.5 16.1,18.1 | 16.1,18.1 16.1,18.09 TCORE.N03@VCCO_B34 | TCORE.N03@VCCO_B34 15.3,18.1 15.3,15.7 | 15.3,15.69 TCORE.T02@VCCO_B34 | TCORE.U05@VCCO_B34 | TCORE.U05@VCCO_B34 17,14.9 | 17,14.9 16.9,14.8 16.9,14.5 | TCORE.P06@VCCO_B34 17.75,16.9 17.7,16.9 | TCORE.D06@VCCO_B35 18.5,25.3 18.5,27.3 18.94,27.3 TCORE.A07@VCCO_B35 | TCORE.J01@VCCO_B35 14.5,21.29 14.5,21.7 15.3,21.7 | 15.3,21.7 16.9,21.7 16.9,22.5 17.34,22.5 TCORE.G05@VCCO_B35 | TCORE.F02@VCCO_B35 15.3,23.69 | 15.3,23.69 15.3,21.7 | 15.3,23.69 15.3,25.8 15.74,25.8 TCORE.C03@VCCO_B35 16.1,26.09 16.1,28.2 19,28.2 20.9,28.2 20.9,27.2 21.21,26.89 TCORE.B10@VCCO_B16 | 34.1,15.1 34.1,16.6 | 36.9,15.3 36.9,16.6 | 39.5,15.3 39.5,16.6 | 42.3,15.3 42.3,16.6 | 45.1,15.2 45.1,16.6 | TCORE.V18@VCCO_B14 29.1,14.1 29.1,15.3 | 29.1,15.3 29.1,16.6 29.1,17.7 | TCORE.L17@VCCO_B14 27.3,19.3 29.1,19.3 29.1,17.7 | TCORE.P16@VCCO_14 26.5,17.7 | 26.5,17.7 29.1,17.7 | TCORE.N13@VCCO_14 24.1,17.7 26.5,17.7 | TCORE.U15@VCCO_B14 25.7,15.3 | 25.7,15.3 29.1,15.3 | TCORE.T12@VCCO_B14 23.4,15.3 25.7,15.3 | v11,1.3 v11.6,1.3 | 16.1,18.1 TCORE.N03@VCCO_B34 | 15,15.7 15.3,15.7 | 15.3,15.7 15.3,15.69 | 17.4,14.9 TCORE.U05@VCCO_B34 | 17,14.9 16.9,14.5 | 16.9,14.5 16.9,13.5 | 16.9,13.5 17.7,13.5 | 18.1,17.3 17.7,16.9 | 17.7,16.9 17.7,13.5 | 20.88,16.3 20.9,16.3 v20.9,11.3 v20.3,11.3 | 20.5,16.53 TCORE.P08@CFGBVS_0B
  Top 0.254: TCORE.A07@VCCO_B35 19,27.75 19,28.2 19,32.3 2.1,32.3 v2,32.2 | v48.2,16.6 47,16.6 | 47,16.6 45.1,16.6 42.3,16.6 39.5,16.6 36.9,16.6 34.1,16.6 29.1,16.6 | v48.2,16 47,16.6 | 19.8,14.1 19.8,13.5 18.1,13.5 16.8,13.5 11,13.5 v11,1.3 | v2,32.8 3.9,32.8 | 20.5,16.5 20.5,16.53
  pour Route15: 0.5,0.6 0.5,39.6 59.5,39.6 59.5,0.6
VCCO_B15  (via drill 0.15)
  Top 0.152: TCORE.D16@VCCO_B15 26.5,25.29 26.5,27.69 TCORE.A17@VCCO_B15 | TCORE.C13@VCCO_B15 24.1,26.1 24.1,28.8 | TCORE.H18@VCCO_B15 29,22.1 | 29,22.1 29,23.3 | 29,23.3 29,28.8 | TCORE.K14@VCCO_B15 24.54,20.9 29,20.9 29,22.1 | TCORE.G15@VCCO_15 25.34,23.3 29,23.3 | v49.6,34.1 49.7,34.1 49.7,34.6 v49.6,34.7
  Top 0.254: TCORE.A17@VCCO_B15 27,27.69 27,28.8 | 27,28.8 29,28.8 29,33.9 29.2,34.1 v49.6,34.1 | 24.1,28.8 27,28.8
VREF_1V25  (via drill 0.15)
  Top 0.125: TCORE.K10@VREFP_B0 v21.74,20.89
  Top 0.254: v52.3,23.7 52.4,23.7 VREF_1V25_PINS.1
  Bottom 0.125: 29.8,21.3 21.7,21.3 21.7,20.9 v21.74,20.89
  Bottom 0.254: 29.8,21.3 29.8,17.1 46.8,17.1 v52.3,23.7

## Text on the board
tNames: B35 | B15 | SRCC / F15_P,F16_N | MRCC / H16_P,G16_N | B34 | B14
tDocu: 3V3 | GND | 1V25 | GND | VCCO_0